# Altium PCB Chua_circuit.PcbDoc
Units mil, origin at the board's own origin, x right, y up, seen from the top; angles counter-clockwise.
Board outline 2600.39 x 695.87 mil, 2 copper layers (Top Layer, Bottom Layer), stack 61.8 mil thick; 21 components, 15 nets, 74 pads, 71 vias.
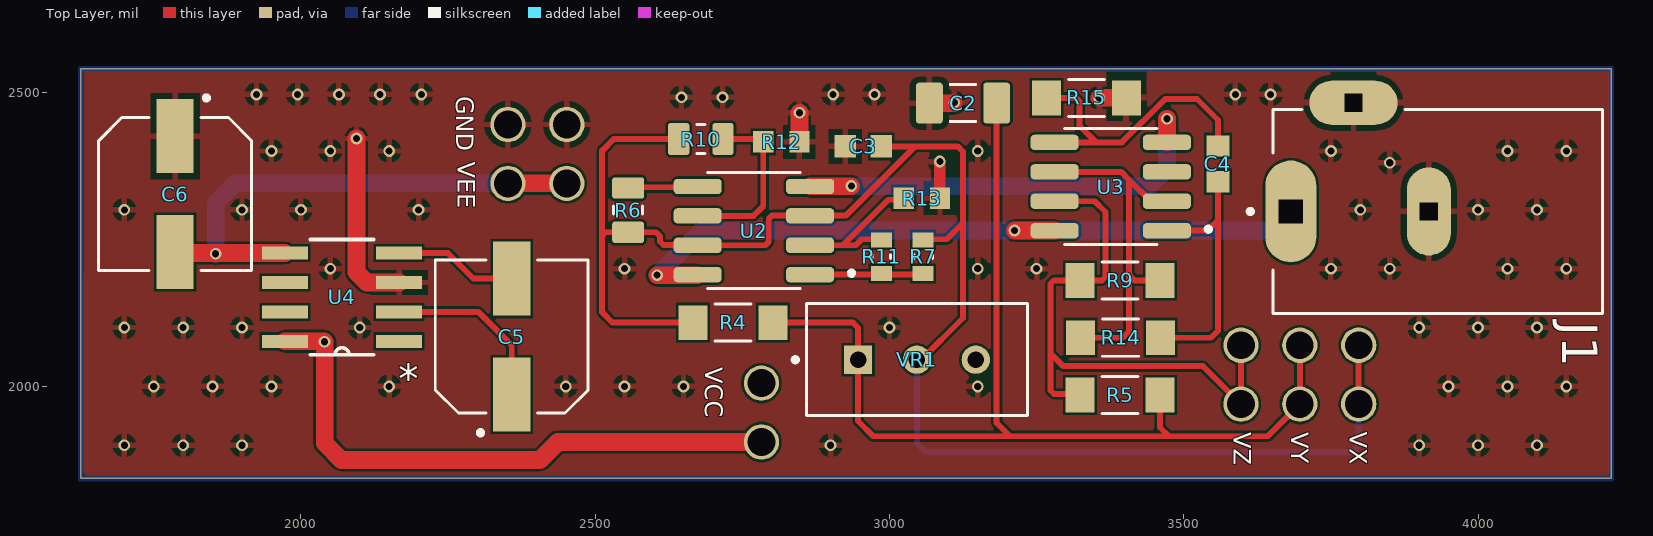
[diagram p0: Top Layer view]
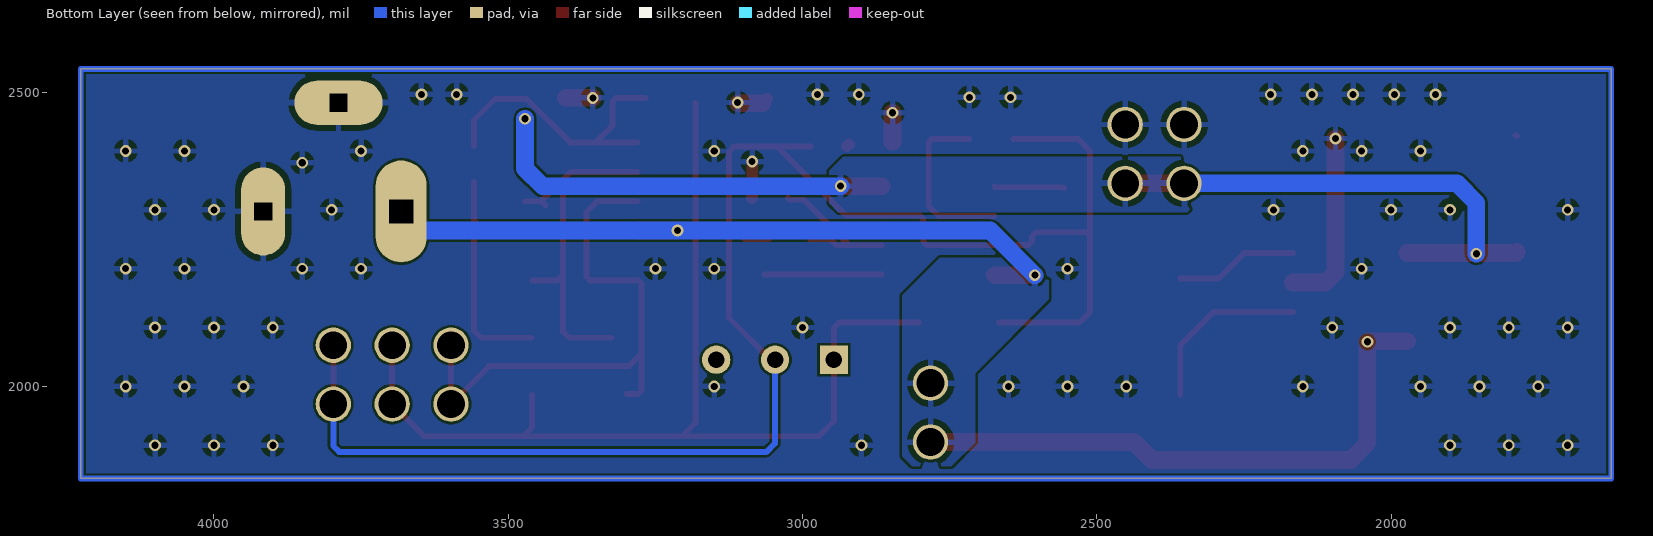
[diagram p1: Bottom Layer view, seen from below]
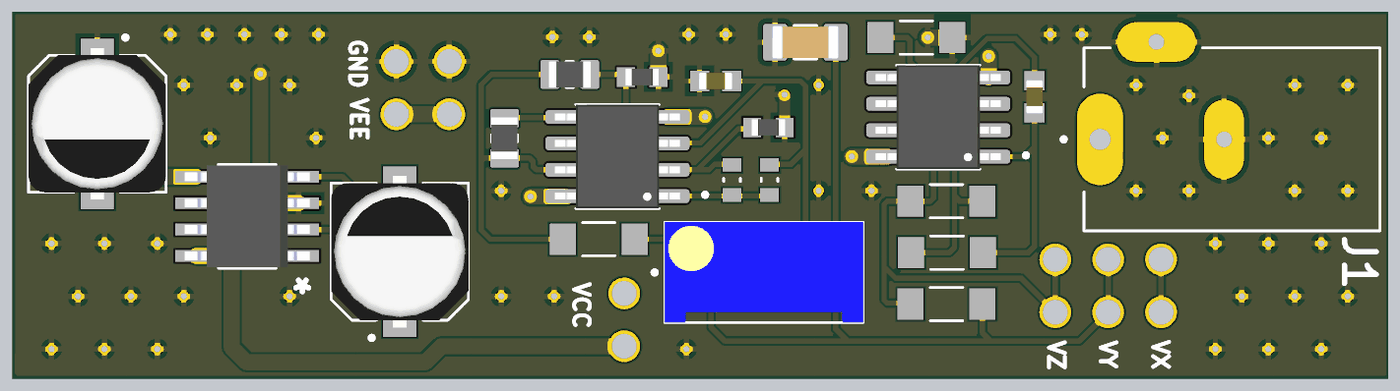
[diagram p2: 3D render of the assembled board from above, using the file's embedded part models]

## Layer stack, top to bottom
Top Solder: solder mask 0.4, Solder Resist, Dk 3.5
Top Layer: signal copper 1.4
Dielectric 1: dielectric 59, FR-4, Dk 4.8
Bottom Layer: signal copper 1.4
Bottom Solder: solder mask 0.4, Solder Resist, Dk 3.5

## Board outline
1625.98,1843.5 1625.98,2539.37 4226.38,2539.37 4226.38,1843.5

## Design rules (kind name [scope] priority, off if disabled: settings)
Clearance [All] p1: gap=4 ignorepadtopadclearanceinfootprint=FALSE
HoleSize [All] p1: absolutevalues=TRUE maxlimit=150 minlimit=1 maxpercent=80.000 minpercent=20.000
HoleToHoleClearance [All] p1: gap=4 allowstackedmicrovias=TRUE
MinimumSolderMaskSliver [All] p1: minsoldermaskwidth=4
PolygonConnect [All] p1: connectstyle=Relief reliefconductorwidth=10 reliefentries=4 polygonreliefangle="90 Angle" airgapwidth=10
RoutingVias [All] p1: holewidth=12 width=20 viastyle="Through Hole" minholewidth=12 minwidth=20 maxholewidth=12 maxwidth=20
SilkToSilkClearance [All] p1: silktosilkclearance=4
SilkToSolderMaskClearance [IsPad] p1: minsilkscreentomaskgap=4 clearancetoexposedcopper=TRUE
SolderMaskExpansion [All] p1: expansion=2 istentingtop=FALSE
Width [InNet('GND')] p1: maxlimit=50 minlimit=20 preferedwidth=20
25 further rules are at their usual default settings.

## Components (designator, comment, footprint, x,y, rotation, side; value= is the part's Value field where it differs from the comment)
C2 "100nF" CAPC3216X100N 3125,2481.3 r0 top
C3 "10nF" CAPC1608X90N 2955.37,2407.82 r0 top
C4 "10nF" CAPC1608X90N 3558.07,2377.95 r270 top
C5 "10uF" CAP_EEEFN1J100L 2358.27,2084.65 r90 top
C6 "10uF" CAP_EEEFN1J100L 1786.42,2326.77 r270 top
J1 "EJ508A" MPD_EJ508A 3788.39,2297.24 r90 top
R4 "1.8kR" RES_ERJU08F1801V 2734.25,2108.27 r180 top
R5 "1.8kR" RES_ERJU08F1801V 3391.73,1985.24 r0 top
R6 "220R" RESC2012X60N 2556.1,2299.41 r270 top
R7 "22kR" RES_ERA3AED223V 3057.09,2220.47 r270 top
R9 "1.8kR" RES_ERJU08F1801V 3391.73,2180.12 r180 top
R10 "220R" RESC2012X60N 2679.53,2420.28 r180 top
R11 "22kR" RES_ERA3AED223V 2986.22,2220.47 r270 top
R12 "2.2kR" RESC1608X55N 2816.34,2415.35 r0 top
R13 "3.3kR" RESC1608X55N 3055.12,2319.88 r180 top
R14 "1.8kR" RES_ERJU08F1801V 3392.72,2082.68 r180 top
R15 "1.8kR" RES_ERJU08F1801V 3334.65,2490.16 r180 top
U2 "TL082" SOIC127P600X175-8N#1 2769.68,2264.76 r180 top
U3 "TL082" SOIC127P600X175-8N#1 3375.98,2339.57 r180 top
U4 "ICL7660CBAZ" SOIC127P600X175-8N#2 2069.88,2151.57 r180 top
VR1 "3296W-FM1-502" TRIM_3296W-FM1-502 3046.65,2045.28 r0 top

## Footprints (in the part's own frame and the unit in brackets; to place one, negate y for a bottom-side part, rotate by r counter-clockwise, add the part's x,y. Pads: shape width x height; smd on the part's side, far side on the other; paste and mask are expansions set on the pad)
CAP_EEEFN1J100L [mm]
  rect 3.2x1.6 smd: 1(-2.5,0) 2(2.5,0)
  silkscreen extent -4.25,-3.3 3.3,3.3, body extent -3.65,-3.3 3.65,3.3, height 5.8
CAPC1608X90N [mm]
  rect 0.92x0.98 smd: 1(-0.775,0) 2(0.775,0)
  body extent -0.8,-0.41 0.8,0.41, height 0.9
CAPC3216X100N [mm]
  rrect25% 1.16x1.77 smd: 1(-1.453,0) 2(1.453,0)
  silkscreen extent -0.55,-0.8 0.55,0.8, body extent -1.6,-0.8 1.6,0.8, height 1
MPD_EJ508A [mm]
  oval 4.4x2.2 hole 1.02 square: 1(0,2.705)
  oval 3.8x1.9 hole 0.76 square: 2(0,-3.25)
  oval 1.9x3.8 hole 0.76 square: 3(4.69,0)
  silkscreen extent -4.4,-10.74 4.4,4.55
RES_ERA3AED223V [mm]
  rect 0.65x0.9 smd: 1(-0.725,0) 2(0.725,0)
  silkscreen extent -0.08,-0.4 0.08,0.4
RES_ERJU08F1801V [mm]
  rect 1.25x1.5 smd: 1(-1.725,0) 2(1.725,0)
  silkscreen extent -0.78,-0.8 0.78,0.8
RESC1608X55N [mm]
  rect 0.87x0.93 smd paste+0 mask+0.102: 1(-0.78,0) 2(0.78,0)
  body extent -0.8,-0.4 0.8,0.4, height 0.55
RESC2012X60N [mm]
  rrect25% 0.92x1.38 smd: 1(-0.955,0) 2(0.955,0)
  silkscreen extent -0.18,-0.63 0.18,0.63, body extent -1,-0.63 1,0.63, height 0.3
SOIC127P600X175-8N#1 [mm]
  rrect50% 2.07x0.66 smd paste+0 mask+0.102: 1(-2.425,1.905) 2(-2.425,0.635) 3(-2.425,-0.635) 4(-2.425,-1.905) 5(2.425,-1.905) 6(2.425,-0.635) 7(2.425,0.635) 8(2.425,1.905)
  silkscreen extent -4.31,-2.5 2,2.5, body extent -3,-2.5 3,2.5, height 1.75
SOIC127P600X175-8N#2 [mm]
  rect 1.981x0.559 smd paste+0 mask+0.102: 1(-2.464,1.905) 2(-2.464,0.635) 3(-2.464,-0.635) 4(-2.464,-1.905) 5(2.464,-1.905) 6(2.464,-0.635) 7(2.464,0.635) 8(2.464,1.905)
  silkscreen extent -1.37,-2.49 1.37,2.49, body extent -3,-2.45 3,2.45, height 1.75
TRIM_3296W-FM1-502 [mm]
  rect 1.218x1.218 / inner round 1.218 / far side rect 1.218x1.218 hole 0.71: 1(-2.54,0)
  round 1.218 hole 0.71: 2(0,0) 3(2.54,0)
  silkscreen extent -5.35,-2.41 4.76,2.42, body extent -4.76,-2.41 4.76,2.42, height 11.55

## Part data
C2: library part CL31B104KBCNNNC, "Ceramic capacitor SMD 1206 100 nF 50 V 10 % Samsung Electro-Mechanics CL31B104KBCNNNC 4000 pc(s)", Package="SMD-2 Samsung", Check_prices=https://www.snapeda.com/parts/CL31B104KBCNNNC/Samsung/view-part/?ref=eda, MF="Samsung Electro-Mechanics", MP=CL31B104KBCNNNC, SnapEDA_Link=https://www.snapeda.com/parts/CL31B104KBCNNNC/Samsung/view-part/?ref=snap
C3 C4: library part 06033C103KAT2A, "0603 X7R ceramic capacitor,10nF 25V", Package="1608 AVX", Check_prices=https://www.snapeda.com/parts/06033C103KAT2A/AVX/view-part/?ref=eda, MF=AVX, MP=06033C103KAT2A, SnapEDA_Link=https://www.snapeda.com/parts/06033C103KAT2A/AVX/view-part/?ref=snap
C5 C6: library part EEEFN1J100L, "CAP ALUM 10UF 20% 63V SMD", Package="RADIAL-2 Panasonic", Check_prices=https://www.snapeda.com/parts/EEEFN1J100L/Panasonic/view-part/?ref=eda, MF=Panasonic, MP=EEEFN1J100L, SnapEDA_Link=https://www.snapeda.com/parts/EEEFN1J100L/Panasonic/view-part/?ref=snap
J1: "Power Barrel Connector Jack 2.10mm ID _0.083_, 5.50mm OD _0.217_ Through Hole, Right Angle", Package="Non-Standard MPD", Availability=Unavailable, MF=MPD, MP=EJ508A, Price=None, SnapEDA_Link=https://www.snapeda.com/parts/EJ508A/MPD%20%28Memory%20Protection%20Devices%29/view-part/474399/?ref=snap
R4 R5 R9 R14 R15: library part ERJU08F1801V, Package=None, Availability=Unavailable, MP=ERJU08F1801V, Price=None
R6 R10: library part RC0805FR-10220KL, "220 kOhms Â±1% 0.125W, 1/8W Chip Resistor 0805 (2012 Metric) - Thick Film", Package="0805 Yageo", Availability="In Stock", Check_prices=https://www.snapeda.com/parts/RC0805FR-10220KL/Yageo/view-part/?ref=eda, MF=Yageo, MP=RC0805FR-10220KL, Price=None, Purchase-URL=https://pricing.snapeda.com/search/part/RC0805FR-10220KL/?ref=eda, SnapEDA_Link=https://www.snapeda.com/parts/RC0805FR-10220KL/Yageo/view-part/?ref=snap
R7 R11: library part ERA3AED223V, Package=None, Availability=Unavailable, MP=ERA3AED223V, Price=None
R12: library part CR0603-JW-222ELF, "Res 0603 2k2 5% 100mW", Package="0603-2 Bourns", Check_prices=https://www.snapeda.com/parts/CR0603-JW-222ELF/Bourns/view-part/?ref=eda, MF=Bourns, MP=CR0603-JW-222ELF, SnapEDA_Link=https://www.snapeda.com/parts/CR0603-JW-222ELF/Bourns/view-part/?ref=snap
R13: library part CR0603-FX-3301ELF, "CR0603 SMD Thick Film Resistor,3K3 1%", Package="0603-2 Bourns", Check_prices=https://www.snapeda.com/parts/CR0603-FX-3301ELF/Bourns/view-part/?ref=eda, MF=Bourns, MP=CR0603-FX-3301ELF, SnapEDA_Link=https://www.snapeda.com/parts/CR0603-FX-3301ELF/Bourns/view-part/?ref=snap
U2 U3: "GENERAL PURPOSE J-FET DUAL OPERATIONAL AMPLIFIERS", Package=None, Check_prices=https://www.snapeda.com/parts/TL082/STMicroelectronics/view-part/?ref=eda, MF=STMicroelectronics, MP=TL082, SnapEDA_Link=https://www.snapeda.com/parts/TL082/STMicroelectronics/view-part/?ref=snap
U4: "Charge Pump Switching Regulator IC Positive or Negative Fixed -Vin, 2Vin 1 Output 45mA 8-SOIC (0.154, 3.90mm Width)", Package="SOIC-8 Renesas Electronics America Inc", Check_prices=https://www.snapeda.com/parts/ICL7660CBAZ/Renesas/view-part/?ref=eda, MF="Renesas Electronics America Inc", MP=ICL7660CBAZ, SnapEDA_Link=https://www.snapeda.com/parts/ICL7660CBAZ/Renesas/view-part/?ref=snap
VR1: "Trimmer Resistors - Through Hole", Package="SOT-23-5 Bourns", Check_prices=https://www.snapeda.com/parts/3296W-FM1-502/Bourns/view-part/?ref=eda, MF=Bourns, MP=3296W-FM1-502, SnapEDA_Link=https://www.snapeda.com/parts/3296W-FM1-502/Bourns/view-part/?ref=snap

## Free pads (board coordinates)
  round 60 hole 47.24: 4(2451.77,2444.88) 4(2782.48,2005.51) 5(2451.77,2344.88) 5(2782.48,1905.51) 6(3797.24,2069.88) 7(3797.24,1969.88) 8(3697.24,2069.88) 9(3697.24,1969.88) 10(3597.24,2069.88) 11(3597.24,1969.88) 12(2351.77,2344.88) 13(2351.77,2444.88)

## Via types
v1: diameter 20, hole 12, Top Layer to Bottom Layer, 71 vias

## Nets (pads, with @x,y where several pads share a name; then routed paths per layer and width w, separated by ;. In a path a pad name is that pad's centre, name@x,y a point inside that pad or via, vN(x,y) a via of type N, cw(c..) or ccw(c..) an arc to the next point about the centre after c; other vN are vias at no path point)
GND: C2.1 C3.1 C6.1 J1.2 J1.3 pad.4@2451.77,2444.88 pad.13 R12.2 R13.1 R15.1 U4.3 | length 531.8
  Top Layer w10: C6.1 C6.1@1788.39,2427.17
  Top Layer w20: R12.2 R12.2@2850.82,2411.58 ; C3.1@2921.09,2411.58 C3.1 ; C2.1@3060.21,2488.88 C2.1 ; v1(3085.63,2381.89) 3085.63,2320.08 R13.1 ; v1@3109.25,2481.3 v1(3110.24,2482.28)
  Top Layer w30: v1(2094.49,2421.26) 2094.49,2194.15 2112.06,2176.57 U4.3 ; R12.2 v1(2847.05,2464.96) ; C2.1 v1@3109.25,2481.3 ; v1(3356.3,2490.16) R15.1
  other v1: 1700,1900 1800,1900 1900,1900 2900,1900 3900,1900 4000,1900 4100,1900 1750,2000 1850,2000 1950,2000 2150,2000 2450,2000 2550,2000 2650,2000 3150,2000 3950,2000 4050,2000 4150,2000 1700,2100 1800,2100 1900,2100 2100,2100 3000,2100 3900,2100 4000,2100 4100,2100 2050,2200 2550,2200 3150,2200 3250,2200 3750,2200 3850,2200 4050,2200 4150,2200 1700,2300 1900,2300 2000,2300 2200,2300 3800,2300 4000,2300 4100,2300 3850,2380 1950,2400 2050,2400 2150,2400 3150,2400 3750,2400 4050,2400 4150,2400 2646.54,2491.14 2716.54,2491.14 1924.61,2496.06 1994.61,2496.06 2064.61,2496.06 2134.61,2496.06 2204.61,2496.06 2904.41,2496.06 2974.41,2496.06 3587.6,2496.06 3647.64,2496.06
NetC2_2: C2.2 pad.8 pad.9 R4.1 R5.2 VR1.1 | length 1841.7
  Top Layer w10: R4.1 2937.99,2108.27 2946.65,2099.61 2946.65,1941.14 2972.44,1915.35 3204.72,1915.35 ; C2.2 3182.2,1937.87 3204.72,1915.35 ; R5.2 3459.65,1930.12 3474.41,1915.35 ; pad.8 pad.9 3642.72,1915.35 3474.41,1915.35 ; 3204.72,1915.35 3474.41,1915.35
NetC4_1: C4.1 R15.2 U3.5 | length 507
  Top Layer w10: R15.2 3316.98,2490.16 3322.83,2484.3 3322.83,2442.91 3351.18,2414.57 ; U3.5 3351.18,2414.57 ; C4.1 3558.07,2452.76 3522.64,2488.19 3468.5,2488.19 3394.88,2414.57 3351.18,2414.57
NetC4_2: C4.2 R14.1 U3.1 | length 449.3
  Top Layer w10: R14.1 3546.26,2082.68 3558.07,2094.49 3558.07,2282.48 ; U3.1 3485.37,2264.57 3540.16,2264.57 3558.07,2282.48 ; C4.2 3558.07,2282.48
NetC5_1: C5.1 U4.2 | length 298.5
  Top Layer w10: U4.2 2301.57,2126.57 2358.27,2069.88 C5.1
NetC5_2: C5.2 U4.4 | length 209.4
  Top Layer w10: U4.4 2249.8,2226.57 2293.31,2183.07 C5.2
NetR5_1: pad.10 pad.11 R5.1 R9.2 U3.7 | length 970.5
  Top Layer w10: U3.7 3348.82,2314.57 3367.13,2296.26 3367.13,2185.98 3361.27,2180.12 R9.2 3279.48,2180.12 3273.62,2174.26 3273.62,2056.1 ; 3298.3,1987.2 3279.48,1987.2 3273.62,1993.06 3273.62,2056.1 ; pad.10 pad.11 3532.68,2034.45 3295.28,2034.45 3273.62,2056.1
NetR6_1: R6.1 U2.5 | length 119.3
  Top Layer w10: R6.1 2557.48,2338.39 2672.83,2338.39 U2.5
NetR7_2: R7.2 R11.2 U2.1 | length 199.1
  Top Layer w10: U2.1@2865.35,2189.96 2963.58,2189.96 R7.2@3064.43,2189.96
NetR9_1: R9.1 R14.2 U3.2 U3.6 | length 623.5
  Top Layer w10: U3.6 3393.7,2364.57 3406.69,2351.57 ; R14.2 3396.65,2082.68 3406.69,2092.72 3406.69,2189.76 ; U3.2@3436.63,2307.5 U3.2@3443.7,2314.57 ; R9.1 3416.34,2180.12 3406.69,2189.76 ; U3.2 U3.2@3443.7,2314.57 ; 3406.69,2189.76 3406.69,2351.57 ; 3406.69,2351.57 U3.2@3443.7,2314.57
NetR10_1: R10.1 R12.1 U2.6 | length 297.9
  Top Layer w10: U2.6 2769.09,2289.76 2785.63,2306.3 R12.1 2780.71,2420.28 R10.1
NetR11_1: R11.1 R13.2 U2.2 | length 296.1
  Top Layer w10: R11.1 2986.22,2250 2952.76,2250 2942.52,2239.76 2920.87,2239.76 ; R13.2 3021.57,2317.04 2998.14,2317.04 2920.87,2239.76 ; U2.2@2898.23,2239.76 U2.2 2868.7,2239.76 U2.2@2898.23,2239.76 ; U2.2@2898.23,2239.76 2920.87,2239.76
VCC: J1.1 pad.4@2782.48,2005.51 pad.5@2782.48,1905.51 U2.8 U3.8 U4.8 | length 2267.9
  Top Layer w30: U4.8 2039.57,2076.57 v1(2040.35,2075.79) 2040.35,1903.54 2068.9,1875 2406.37,1875 2436.89,1905.51 pad.5@2782.48,1905.51 ; v1(2605.32,2188.98) U2.8@2673.43,2188.98 ; v1(3212.6,2264.76) 3280.32,2264.76 U3.8
  Bottom Layer w30: v1(2605.32,2188.98) 2681.1,2264.76 v1(3212.6,2264.76) 3655.74,2264.76 3681.89,2290.92 J1.1
VEE: C6.2 pad.5@2451.77,2344.88 pad.12 U2.4 U3.4 U4.5 | length 1626.9
  Top Layer w30: C6.2 1788.19,2226.57 1854.13,2226.57 v1(1855.32,2225.39) ; v1@1856.5,2226.57 U4.5 ; pad.12 pad.5@2451.77,2344.88 ; U2.4 2934.76,2339.76 v1(2935.29,2340.3) ; U3.4 v1(3471.46,2454.72)
  Bottom Layer w30: v1(1855.32,2225.39) 1855.32,2312.01 1888.19,2344.88 pad.12 ; v1(2935.29,2340.3) 3441.68,2340.3 3471.46,2370.08 v1(3471.46,2454.72)
VX: C3.2 pad.6 pad.7 R4.2 R6.2 R7.1 R10.2 U2.3 U2.7 VR1.2 | length 2896.3
  Top Layer w10: R10.2 2531.5,2420.28 2511.81,2400.59 2511.81,2255.95 ; R4.2 2529.53,2108.27 2511.81,2125.98 2511.81,2255.95 ; U2.3@2865.07,2289.68 U2.3 ; C3.2 3043.64,2407.82 ; VR1.2@3053.15,2044.29 3125,2116.14 3125,2277.56 ; R7.1@3057.09,2250 3097.44,2250 3125,2277.56 ; pad.7 pad.6 ; 2511.81,2255.95 2517.67,2261.81 R6.2 2603.35,2261.81 2610.24,2254.92 2610.24,2246.02 2616.09,2240.16 2673.82,2240.16 U2.7 2789.02,2239.76 2794.88,2245.62 2794.88,2284.69 2800.74,2290.55 2865.07,2290.55 2926.38,2290.55 3043.64,2407.82 ; 3043.64,2407.82 3115.81,2407.82 3125,2398.62 3125,2277.56
  Bottom Layer w10: VR1.2 3046.65,1903.15 3061.02,1888.78 3787.4,1888.78 3797.24,1898.62 pad.7
pads on no net: U3.3 U4.1 U4.6 U4.7 VR1.3
copper on no net: | length 6592.5
  Bottom Layer w10: 1625.98,1843.5 4226.38,1843.5 4226.38,2539.37 1625.98,2539.37 1625.98,1843.5

## Polygon pours and split planes (outlines as drawn)
GND on Bottom Layer "GND_L02_P018" (solid, pour order 18): 1625.98,2539.37 1625.98,1843.5 4226.38,1843.5 4226.38,2539.37
VEE on Bottom Layer "VEE_L02_P015" (solid, pour order 15): 2317.91,2389.76 2931.1,2389.76 2954.72,2366.14 2954.72,2311.02 2939.96,2296.26 2346.46,2296.26 2317.91,2324.8
VCC on Bottom Layer "VCC_L02_P014" (solid, pour order 14): 2581.69,2218.5 2766.73,2218.5 2830.71,2154.53 2830.71,1880.91 2813.98,1864.17 2747.05,1864.17 2706.69,1904.53 2706.69,2022.64 2581.69,2147.64
GND on Top Layer "GND_L01_P016" (solid, pour order 16): 1631.89,2534.45 4222.44,2534.45 4222.44,1850.39 4221.46,1849.41 1630.91,1849.41

## Silkscreen, mask and mechanical layers (free items; w line width, h text height)
Top Overlay:
  text "GND" at 2263.94,2492.95 h30 r270
  text "VEE" at 2266.89,2381.73 h30 r270
  text "VCC" at 2687.17,2032.32 h30 r270
  text "VX" at 3781.65,1923.07 h30 r270
  text "VZ" at 3584.8,1922.09 h30 r270
  text "VY" at 3682.24,1922.09 h30 r270

## Text inside footprints (layer, text, board x,y; h text height)
U4: Top Overlay "*" at 2199.88,2059.57 h50 r180; Mechanical 13 "*" at 2199.88,2059.57 h50 r180